# EAGLE board L_BRD (EAGLE 9.6.2)
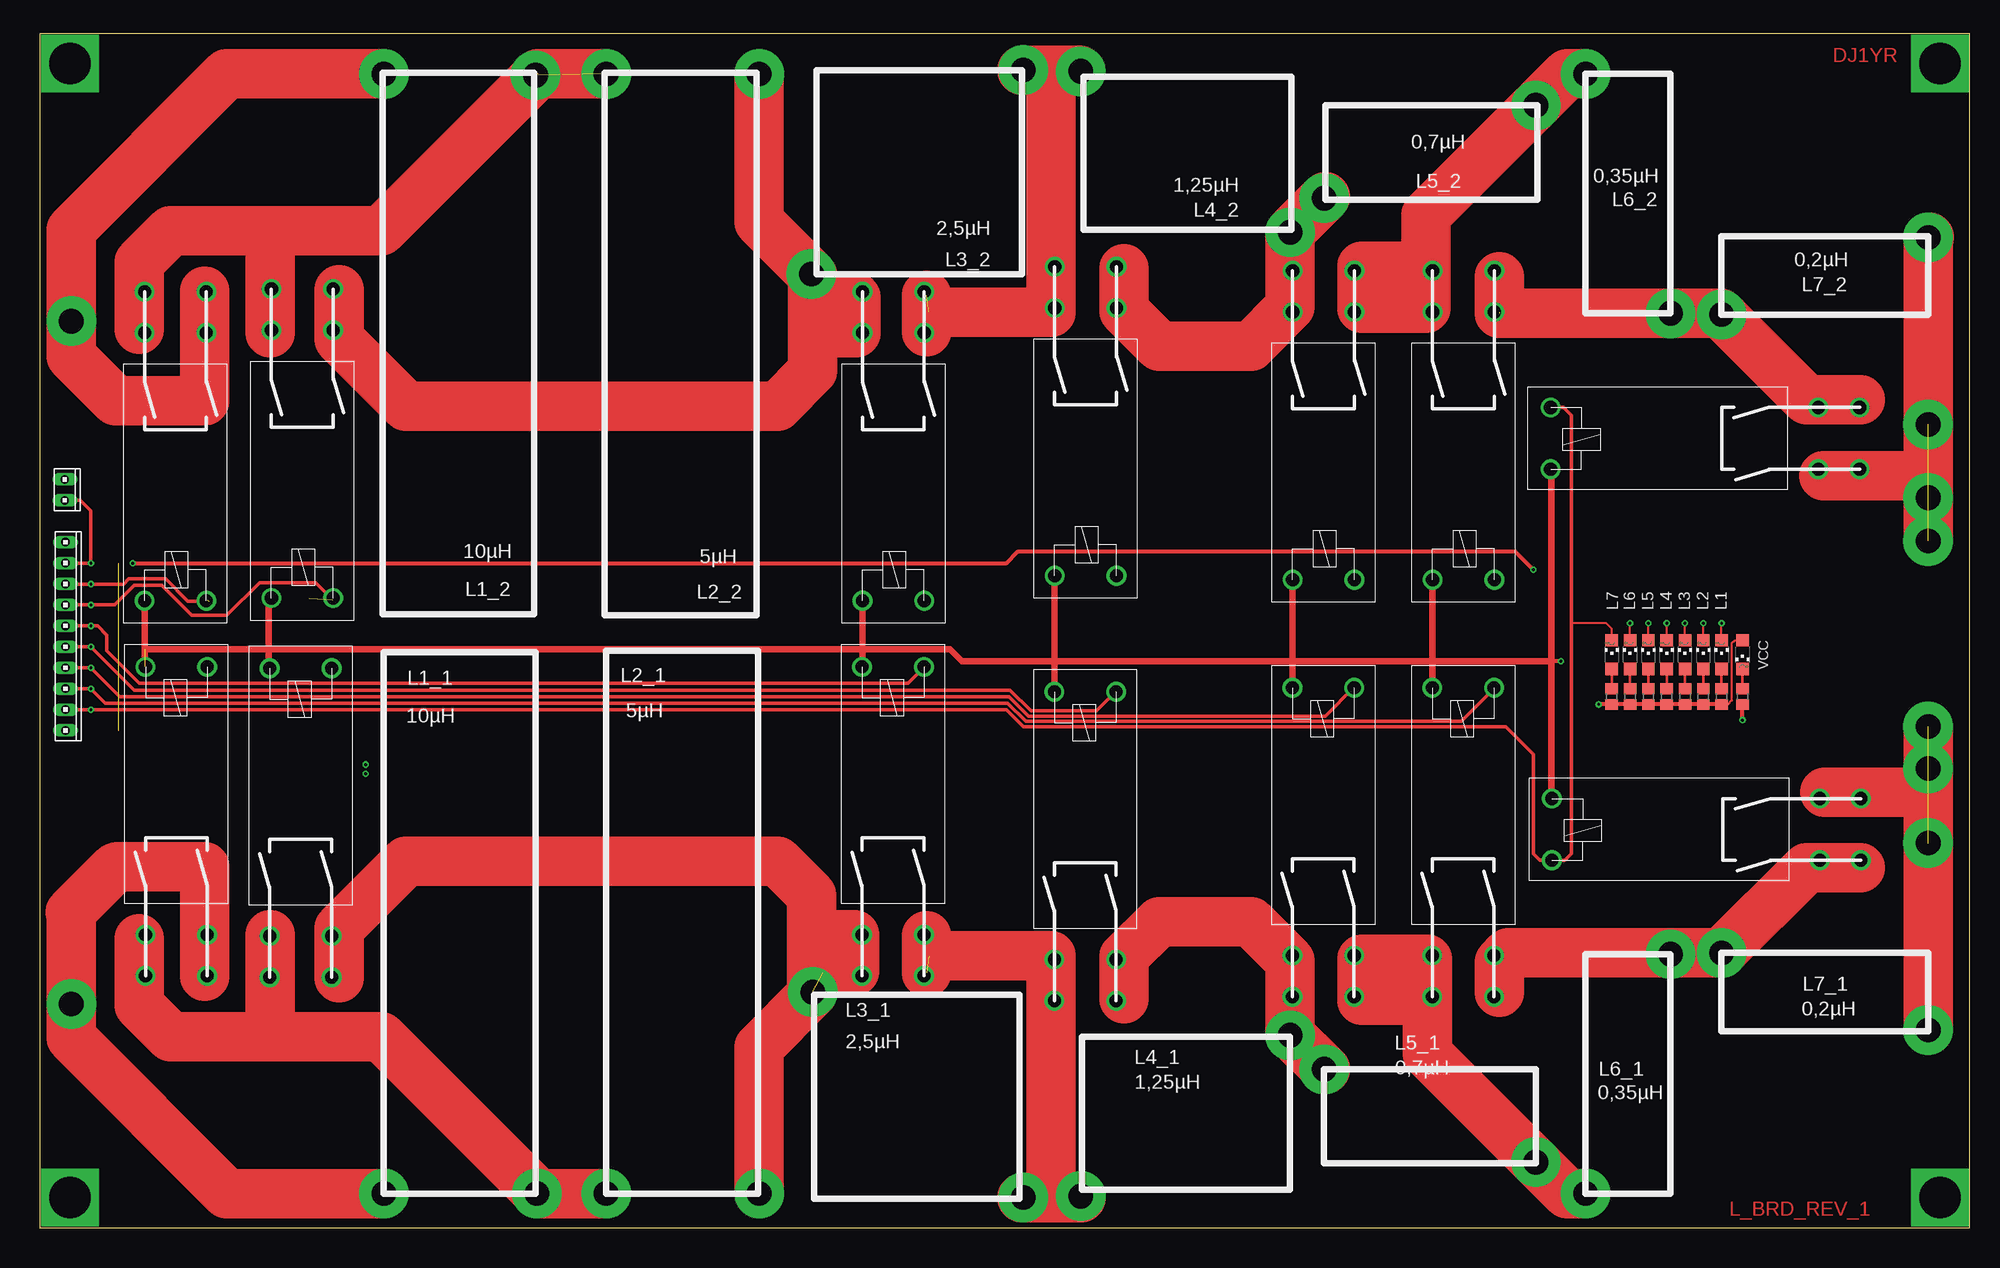
[diagram p0: board, top side]
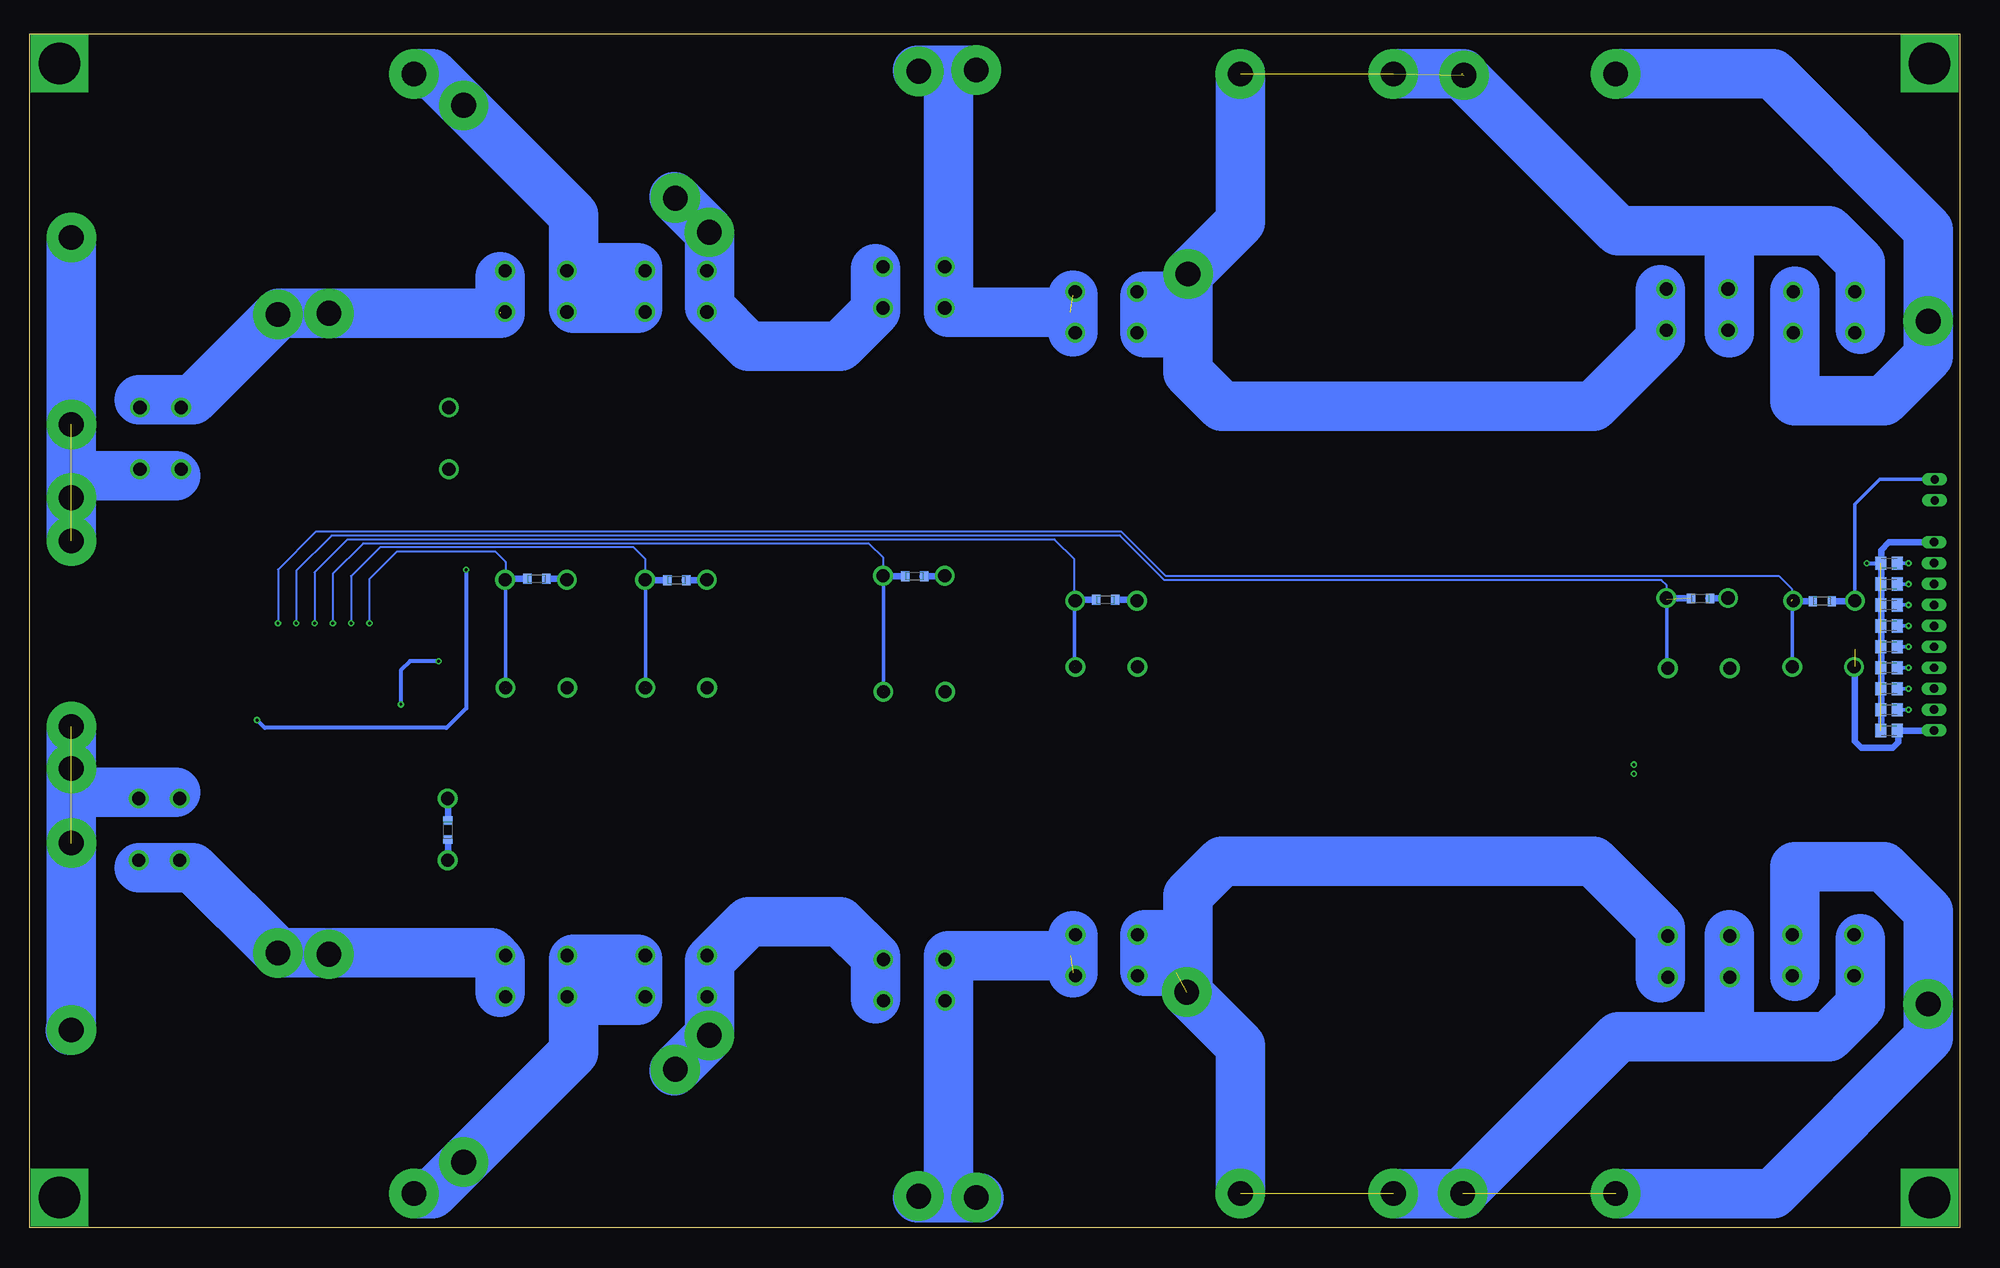
[diagram p1: board, bottom side, seen from below]

Size 234.29 x 144.92 mm. Coordinates in mm from the lower left corner, seen from the top.
Outline: 0,0 234.29,0 234.29,144.92 0,144.92 0,0
Copper layers (1*16): Top 0.035mm / dielectric 1.5mm / Bottom 0.035mm
Design rules "default *": minimum track width 6mil, minimum drill 0.35mm, track to track 6mil, track to pad 6mil, pad to pad 6mil, via to via 6mil, smd to smd 6mil, copper to edge 0mil, drill to drill 6mil, minimum pad ring 10mil, minimum via ring 8mil, stop-mask expansion 4mil, vias tented up to drill 0mil, thermal gap 10mil

## Footprints (pad centres in the part's own frame; a part is rotated, then mirrored left to right if it is on the bottom)
CHIPLED_1206 = smd 1.5 x 1.5: A 0,-1.75; C 0,1.75
10X10MTA = drill 1.016 long: 1 11.43,0; 2 8.89,0; 3 6.35,0; 4 3.81,0; 5 1.27,0; 6 -1.27,0; 7 -3.81,0; 8 -6.35,0; 9 -8.89,0; 10 -11.43,0
C0805K = smd 1.3 x 1.6: 1 -1,0; 2 1,0
SOD110-W = smd 1 x 1.2: A 1.15,0; C -1.15,0
R0805 = smd 1.3 x 1.5: 1 -0.95,0; 2 0.95,0
10X02MTA = drill 1.016 long: 1 1.27,0; 2 -1.27,0
FINDER45.91.7.024.0310 = drill 1.6: P$1 2.75,2.5; P$2 2.75,10; P$3 35.25,2.5; P$4 35.25,10; P$5 40.25,2.5; P$6 40.25,10

## Placement (x,y rotation side)
C7  [CHIPLED_1206]  204.15,69.53 0 top
E$1  [10X10MTA]  3.11,71.77 270 top
E$2  [C0805K]  8.57,60.33 180 bottom
E$3  [C0805K]  8.57,62.87 180 bottom
E$4  [C0805K]  8.57,65.41 180 bottom
E$5  [C0805K]  8.57,67.94 180 bottom
E$6  [C0805K]  8.57,70.48 180 bottom
E$7  [C0805K]  8.57,73.03 180 bottom
E$8  [C0805K]  8.57,75.56 180 bottom
E$9  [C0805K]  8.57,78.11 180 bottom
E$10  [C0805K]  8.57,80.64 180 bottom
E$11  [SOD110-W]  16.67,76.04 180 bottom
E$12  [SOD110-W]  31.43,76.36 180 bottom
E$13  [R0805]  206.69,64.45 270 top
E$15  [R0805]  204.15,64.45 270 top
E$16  [R0805]  201.93,64.45 270 top
E$17  [SOD110-W]  183.51,48.26 270 bottom
E$18  [10X02MTA]  3.02,89.53 270 top
E$19  [FINDER45.91.7.024.0310]  10.32,70.8 270 top
E$20  [FINDER45.91.7.024.0310]  25.4,70.64 270 top
E$21  [FINDER45.91.7.024.0310]  97.31,70.8 270 top
E$22  [FINDER45.91.7.024.0310]  120.65,67.79 270 top
E$23  [FINDER45.91.7.024.0310]  149.54,68.26 270 top
E$24  [FINDER45.91.7.024.0310]  166.53,68.26 270 top
E$25  [FINDER45.91.7.024.0310]  180.82,42.07 0 top
E$26  [R0805]  199.71,64.45 270 top
E$27  [R0805]  197.49,64.45 270 top
E$28  [R0805]  195.26,64.45 270 top
E$29  [R0805]  193.04,64.45 270 top
E$30  [FINDER45.91.7.024.0310]  109.86,73.34 90 top
E$31  [FINDER45.91.7.024.0310]  133.19,76.36 90 top
E$32  [FINDER45.91.7.024.0310]  162.08,75.88 90 top
E$33  [FINDER45.91.7.024.0310]  38.1,73.66 90 top
E$34  [FINDER45.91.7.024.0310]  22.7,73.34 90 top
E$35  [R0805]  190.82,64.45 270 top
E$40  [FINDER45.91.7.024.0310]  179.07,75.88 90 top
E$41  [FINDER45.91.7.024.0310]  180.66,89.53 0 top
E$42  [SOD110-W]  103.66,76.2 180 bottom
E$43  [SOD110-W]  126.84,79.06 180 bottom
E$44  [SOD110-W]  155.73,78.58 180 bottom
E$45  [SOD110-W]  172.72,78.74 180 bottom
L2  [CHIPLED_1206]  201.93,69.53 0 top
L3  [CHIPLED_1206]  199.71,69.53 0 top
L4  [CHIPLED_1206]  197.49,69.53 0 top
L5  [CHIPLED_1206]  195.26,69.53 0 top
L6  [CHIPLED_1206]  193.04,69.53 0 top
L7  [CHIPLED_1206]  190.82,69.53 0 top
VCC  [CHIPLED_1206]  206.69,69.53 180 top

## Library data of the parts
C7 L2-L7 VCC = led
E$1 E$18 = con-amp
E$2-E$10 E$13 E$15 E$16 E$26-E$29 E$35 = rcl
E$11 E$12 E$17 E$42-E$45 = diode
E$19-E$25 E$30-E$34 E$40 E$41 = Finder 45.91.7.024.0310

## Nets
S$13: E$18.1
S$24: E$2.2 E$3.2 E$4.2 E$5.2 E$6.2 E$7.2 E$8.2 E$9.2 E$10.2
S$29: E$18.2

## Tracks (layer width: path | path; a pad name or v marks a point on that pad's centre or on a via)
+24V  (via drill 0.35)  (2 unrouted)
  Top 0.508: v184.63,68.74 183.2,68.74
  Top 0.813: 183.51,52.07 183.51,68.74 | 183.51,68.74 183.2,68.74 169.07,68.74 | 169.07,68.74 152.08,68.74 | 152.08,68.74 123.19,68.74 | 123.19,68.74 111.92,68.74 110.49,70.17 99.85,70.17 | 99.85,70.17 27.78,70.17 | 27.78,70.17 12.7,70.17 | 27.78,67.94 27.78,70.17 | 99.85,68.1 99.85,70.17 | 123.19,64.93 123.19,68.74 | 152.08,65.56 152.08,68.74 | 169.07,65.41 169.07,68.74 | 183.51,68.74 183.51,92.08 | 169.07,68.74 169.07,78.58 | 152.08,68.74 152.08,78.74 | 123.19,68.74 123.19,79.06 | 99.85,70.17 99.85,76.04 | 27.78,70.17 27.78,76.36 | 12.7,68.1 12.7,76.04
  Bottom 0.508: v184.63,68.74 188.12,68.74 189.23,67.63 v189.23,63.5
  Bottom 0.813: 3.02,60.33 7.46,60.33 7.46,58.9 8.1,58.26 11.91,58.26 12.7,59.05 12.7,68.1
+24V1
  Top 0.254: 203.84,63.5 204.95,63.5 205.42,63.98 205.42,70.96 205.74,71.28 206.38,71.28 206.38,71.12
  Top 0.406: 204.15,63.5 204.15,63.66
  Top 0.508: 204.15,63.5 203.84,63.5 189.23,63.5
GND
  Bottom 0.813: 3.17,83.19 8.57,83.19 9.53,82.23 9.53,60.33
L1  (via drill 0.35)
  Top 0.254: 190.82,71.28 190.82,72.71 190.18,73.34 185.9,73.34
  Top 0.406: 3.17,62.87 v6.19,62.87 117.32,62.87 119.38,60.8 177.96,60.8 181.29,57.47 181.29,45.4 182.09,44.61 185.1,44.61 185.9,45.4 185.9,73.34 185.9,98.58 184.94,99.54 183.51,99.54
  Bottom 0.406: v6.19,62.87 7.62,62.87
L2  (via drill 0.35)  (1 unrouted)
  Top 0.254: 193.04,71.28 v193.04,73.34
  Top 0.406: 3.17,65.41 v6.19,65.41 7.94,63.66 117.47,63.66 119.7,61.44 172.56,61.44 176.53,65.41
  Bottom 0.254: v193.04,73.34 193.04,78.74 189.71,82.07 177.8,82.07 176.53,80.8 176.53,78.74
  Bottom 0.406: v6.19,65.41 7.62,65.41 | 176.53,65.41 176.53,78.74
  Bottom 0.813: 176.53,78.74 174.15,78.74
L3  (via drill 0.35)  (1 unrouted)
  Top 0.254: 195.26,71.12 v195.26,73.34
  Top 0.406: 159.54,65.56 156.05,62.07 120.02,62.07 117.63,64.45 9.68,64.45 v6.19,67.94 3.17,67.94
  Bottom 0.254: 159.54,78.42 159.54,81.12 160.97,82.55 191.77,82.55 195.26,79.06 v195.26,73.34
  Bottom 0.406: v6.19,67.94 7.62,67.94 | 159.54,65.56 159.54,78.42 159.54,78.58 159.54,78.74
  Bottom 0.813: 159.54,78.58 157.16,78.58
L4  (via drill 0.35)  (1 unrouted)
  Top 0.254: 197.49,71.28 v197.49,73.34
  Top 0.406: 3.17,70.48 v6.19,70.48 11.43,65.25 117.79,65.25 120.33,62.71 128.27,62.71 130.65,65.09
  Bottom 0.254: 130.65,79.06 130.65,81.28 132.4,83.03 193.83,83.03 197.49,79.38 v197.49,73.34 197.49,73.18
  Bottom 0.406: v6.19,70.48 7.62,70.48 | 130.65,65.09 130.65,79.06
  Bottom 0.813: 130.65,79.06 128.27,79.06
L5  (via drill 0.35)  (1 unrouted)
  Top 0.254: 199.71,71.28 v199.71,73.34
  Top 0.406: 107.47,68.1 105.41,66.04 12.06,66.04 8.1,70.01 8.1,71.91 6.99,73.03 v6.19,73.03 3.02,73.03
  Bottom 0.254: 107.16,76.2 107.16,76.04 107.31,76.2 107.47,76.2 107.47,81.12 109.86,83.5 195.74,83.5 199.71,79.53 v199.71,73.34
  Bottom 0.406: v6.19,73.03 7.62,73.03 | 107.47,68.1 107.47,76.04 107.31,76.2
  Bottom 0.813: 107.31,76.04 107.31,76.2 107.16,76.2 104.78,76.2
L6  (via drill 0.35)  (1 unrouted)
  Top 0.406: 35.56,76.2 33.5,78.26 26.67,78.26 22.7,74.3 18.41,74.3 14.76,77.95 11.43,77.95 9.05,75.56 v6.19,75.56 3.17,75.56
  Bottom 0.254: 35.56,76.2 35.56,77.95 36.2,78.58 96.52,78.58 101.92,83.98 197.64,83.98 201.93,79.69 201.93,73.5 v201.93,73.34
  Bottom 0.406: v6.19,75.56 7.46,75.56 | 35.56,67.94 35.56,76.2
  Bottom 0.813: 35.56,76.2 35.56,76.36 32.7,76.36
L7  (via drill 0.35)  (1 unrouted)
  Top 0.254: 204.15,71.28 v204.15,73.34
  Top 0.406: 3.17,78.11 v6.19,78.11 10.16,78.11 10.79,78.74 15.24,78.74 17.94,76.04 20.48,76.04
  Bottom 0.254: 20.32,76.04 20.32,77.47 21.91,79.06 96.36,79.06 101.76,84.45 199.55,84.45 204.15,79.85 v204.15,73.34 203.99,73.34
  Bottom 0.406: v6.19,78.11 7.62,78.11 | 20.32,67.94 20.32,76.04 20.32,76.2
  Bottom 0.813: 20.32,76.04 17.94,76.04
S$1
  Bottom 0.813: 183.51,44.61 183.51,46.99
S$2
  Bottom 0.813: 183.51,52.07 183.51,49.37
S$3
  Bottom 0.813: 169.07,78.74 171.61,78.74
S$4
  Bottom 0.813: 152.08,78.74 152.08,78.58 154.78,78.58
S$5
  Bottom 0.813: 123.19,79.06 125.89,79.06
S$6
  Bottom 0.813: 99.85,76.2 102.39,76.2
S$7
  Bottom 0.813: 27.78,76.36 30.48,76.36
S$8
  Bottom 0.813: 12.86,76.04 15.56,76.04
S$9
  Top 6: 27.94,108.58 27.94,120.02
S$10
  Top 6: 27.94,35.56 27.94,23.65
S$11  (via drill 3 pad 6)  (2 unrouted)
  Top 6: 36.35,30.32 36.35,36.35 44.45,44.45 89.53,44.45 93.66,40.32 93.66,28.57 93.82,28.42 87.31,21.91 v87.31,4.13 | 12.06,35.08 12.06,26.99 15.88,23.18 41.43,23.18 60.48,4.13 v68.74,4.13
  Bottom 6: 36.35,30.32 36.35,36.35 44.45,44.45 89.53,44.45 93.66,40.32 93.66,29.84 v93.82,28.57 87.31,22.07 v87.31,4.13 | 94.93,35.56 98.9,35.56 98.9,31.11 95.09,31.11 95.09,30.96
S$12
  Top 6: 95.09,31.11 98.9,31.11 98.9,35.56 94.61,35.56
S$13  (via drill 0.35)
  Top 0.406: 3.17,80.64 v6.19,80.64 6.19,87 4.92,88.27 E$18.1
  Bottom 0.406: v6.19,80.64 7.46,80.64
S$14
  Top 6: 107.63,35.4 107.63,30.96
S$15
  Top 6: 108.9,33.02 122.71,33.02 122.71,3.65 | 122.71,3.65 119.22,3.65 | 122.71,3.65 126.36,3.65
S$16
  Top 6: 131.6,27.78 131.6,32.86 135.89,37.15 147,37.15 151.76,32.38 151.76,23.5 156.05,19.21
S$17
  Top 6: 177.16,28.57 177.16,32.23 178.28,33.34 204.15,33.34 214.47,43.66 220.98,43.66
S$18  (via drill 0.35)
  other vias: 39.53,56.2
S$19  (via drill 0.35)
  other vias: 39.53,55.09
S$20
  Top 6: 216.69,52.86 228.76,52.86
S$21
  Top 6: 216.53,91.28 228.92,91.28
S$22
  Top 6: 220.98,100.49 214.47,100.49 203.99,110.97 177.16,110.97 177.16,115.41
S$23
  Top 6: 107.63,108.74 107.63,113.19
S$24  (8 unrouted)
S$25  (via drill 3 pad 6)
  Top 6: v187.64,140.02 185.42,140.02 168.28,122.87 168.28,111.6 160.5,111.6 160.5,116.36 160.66,116.52 160.5,116.68 167.8,116.68
S$26
  Top 6: 95.25,112.87 95.57,112.87 95.73,113.03 98.9,113.03 99.06,112.87 99.06,108.58 95.57,108.58
S$27  (via drill 3 pad 6)
  Top 6: 20,113.67 20,100.33 9.21,100.33 3.81,105.73 3.81,121.13 22.7,140.02 v41.75,140.02
S$28
  Bottom 6: 95.09,113.03 98.9,113.03 98.9,108.58 94.93,108.58
S$29
  Bottom 0.406: 12.7,76.04 12.7,87.79 9.68,90.81 E$18.2
S$30  (1 unrouted)
  Bottom 6: 60.33,140.02 68.74,140.02 | 60.48,140.02 41.43,120.97 15.88,120.97 12.06,117.16 12.06,109.06
S$31  (via drill 0.35)
  Top 0.508: v11.27,80.64 117.32,80.64 118.75,82.07 179.07,82.07 v181.29,79.85 | v206.69,61.59 206.69,63.5
  Bottom 0.508: v11.27,80.64 9.68,80.64 | v181.29,79.85 181.29,63.02 183.67,60.64 205.74,60.64 v206.69,61.59
S$35  (via drill 3 pad 6)  (1 unrouted)
  Top 6: v41.75,4.13 22.7,4.13 3.81,23.02 3.81,38.1 3.65,38.26 9.05,43.66 9.21,43.66 9.37,43.81 20,43.81 20,30.48
  Bottom 6: v60.33,4.13 68.74,4.13
S$37  (via drill 3 pad 6)
  Bottom 6: 20,30.48 20,43.81 9.21,43.81 3.81,38.42 v3.81,27.15 3.81,23.02 22.7,4.13 41.59,4.13
S$39
  Bottom 6: 12.06,35.08 12.06,26.99 15.88,23.18 41.43,23.18 60.48,4.13
S$40
  Top 0.305: 201.93,67.63 201.93,65.41
S$41  (via drill 3 pad 6)
  other vias: 119.38,3.65
S$42  (via drill 3 pad 6)  (1 unrouted)
  Bottom 6: v126.36,3.81 122.71,3.81 122.71,33.02 107.95,33.02 | 107.63,35.4 107.63,30.96
S$43  (via drill 5 pad 7)
  other vias: 3.65,141.29
S$44  (via drill 5 pad 7)
  other vias: 3.65,3.65
S$45  (via drill 5 pad 7)
  other vias: 230.66,3.65
S$46  (via drill 5 pad 7)
  other vias: 230.66,141.29
S$47
  Bottom 6: 119.06,3.65 126.52,3.65
S$48  (via drill 3 pad 6)
  Bottom 6: 156.05,19.05 v151.76,23.34 151.76,32.38 147,37.15 135.89,37.15 131.6,32.86 131.6,27.78
S$49  (via drill 3 pad 6)
  other vias: 155.89,19.21
S$50  (via drill 3 pad 6)
  other vias: 197.96,33.18
S$51  (via drill 3 pad 6)
  other vias: 181.61,7.94
S$52  (via drill 3 pad 6)
  Bottom 6: 220.98,43.66 214.47,43.66 v204.15,33.34 178.28,33.34 177.16,32.23 177.16,28.57
S$53
  Bottom 6: 27.94,108.58 27.94,120.33
S$54  (via drill 3 pad 6)
  other vias: 93.66,115.73
S$55  (via drill 3 pad 6)
  Top 6: v126.36,140.34 126.21,140.49 122.71,140.49 | 108.58,111.12 122.71,111.12 122.71,140.49 | 122.71,140.49 119.22,140.49
S$56  (via drill 3 pad 6)
  Top 6: 131.6,116.36 131.6,111.28 135.89,107 147,107 151.76,111.76 v151.76,120.81 156.05,125.09
S$57  (via drill 3 pad 6)
  other vias: 204.15,110.81
S$58
  Bottom 6: 27.94,35.56 27.94,23.81
S$59
  Top 0.254: 201.93,71.28 201.93,73.34
S$74  (via drill 3 pad 6)  (3 unrouted)
  Top 6: v229.24,23.97 v229.24,60.8
  Bottom 6: 229.39,23.97 v229.24,23.97 v229.24,60.8 | 216.53,52.86 229.24,52.86
  other vias: 229.24,46.67 229.24,55.72
S$79  (via drill 3 pad 6)
  Top 6: v187.64,4.13 185.42,4.13 168.43,21.11 168.43,32.54 160.5,32.54 160.5,27.62 168.12,27.62
  Bottom 6: 160.5,27.94 160.5,32.54 168.28,32.54 168.28,27.62 | 168.28,27.62 168.28,21.27 185.42,4.13 v187.64,4.13 | 168.28,27.62 160.5,27.62
S$99  (via drill 3 pad 6)
  Bottom 6: 20,113.67 20,100.33 9.21,100.33 3.81,105.73 v3.81,110.01 3.81,112.55 3.81,121.13 22.7,140.02 41.59,140.02
S$100  (via drill 3 pad 6)  (2 unrouted)
  Top 6: v87.31,140.02 87.31,122.08 93.82,115.57 93.82,103.98 89.53,99.69 44.45,99.69 36.35,107.79 36.35,113.82 | v68.74,140.02 60.48,140.02 41.43,120.97 15.88,120.97 12.06,117.16 12.06,109.06
  Bottom 6: 36.35,113.82 36.35,107.79 44.45,99.69 89.53,99.69 93.66,103.82 93.66,115.73 87.31,122.08 v87.31,140.02
  other vias: 60.17,139.86
S$103  (via drill 3 pad 6)
  other vias: 119.38,140.49
S$105  (1 unrouted)
  Bottom 6: 122.71,140.34 122.71,111.12 107.95,111.12 | 107.63,108.74 107.63,113.19
S$106
  Bottom 6: 119.38,140.49 126.52,140.49
S$107
  Bottom 6: 156.05,125.09 151.76,120.81 151.76,111.76 147,107 135.89,107 131.6,111.28 131.6,116.36
S$108  (via drill 3 pad 6)
  other vias: 155.89,124.94
S$109  (via drill 3 pad 6)
  other vias: 197.96,110.97
S$110  (via drill 3 pad 6)
  other vias: 181.61,136.21
S$111  (1 unrouted)
  Bottom 6: 177.16,110.97 203.99,110.97 214.47,100.49 220.98,100.49 | 177.16,115.41 177.16,111.12
S$112  (via drill 3 pad 6)  (3 unrouted)
  Top 6: 229.39,120.17 v229.24,120.17 v229.24,83.34
  Bottom 6: v229.24,120.17 v229.24,83.34 | 216.53,91.28 229.24,91.28
  other vias: 229.24,97.47 229.24,88.58
S$114
  Top 0.305: 206.69,67.94 206.69,65.41
S$116
  Top 0.305: 204.15,67.79 204.15,65.41
S$117
  Bottom 6: 160.5,116.2 160.5,111.6 168.28,111.6 168.28,116.52 | 168.28,116.52 168.28,122.87 185.42,140.02 187.64,140.02 | 168.28,116.52 160.5,116.52
S$118
  Top 0.305: 199.71,67.79 199.71,65.41
S$119
  Top 0.305: 197.49,67.63 197.49,65.41
S$120
  Top 0.305: 195.26,67.79 195.26,65.41
S$121
  Top 0.305: 193.04,67.79 193.04,65.41
S$122
  Top 0.305: 190.82,67.79 190.82,65.41

## Text on the board
Top: DJ1YR | L_BRD_REV_1
tPlace: 0,7µH | 0,35µH | L5_2 | 1,25µH | L6_2 | L4_2 | 2,5µH | L3_2 | 0,2µH | L7_2 | 10µH | 5µH | L1_2 | L2_2 | L1_1 | L2_1 | 5µH | 10µH | L7_1 | L3_1 | 0,2µH | 2,5µH | L5_1 | L4_1 | 0,7µH | L6_1 | 1,25µH | 0,35µH
tNames: L7 | L6 | L5 | L4 | L3 | L2 | L1